# Altium PCB MODBUS_Interface_Board__03.PcbDoc
Units mm, origin at the board's own origin, x right, y up, seen from the top; angles counter-clockwise.
Board outline 56 x 26 mm, 2 copper layers (Top Layer, Bottom Layer); 20 components, 17 nets, 88 pads, 0 vias.
Unrouted connection lines stored in the file: 3.
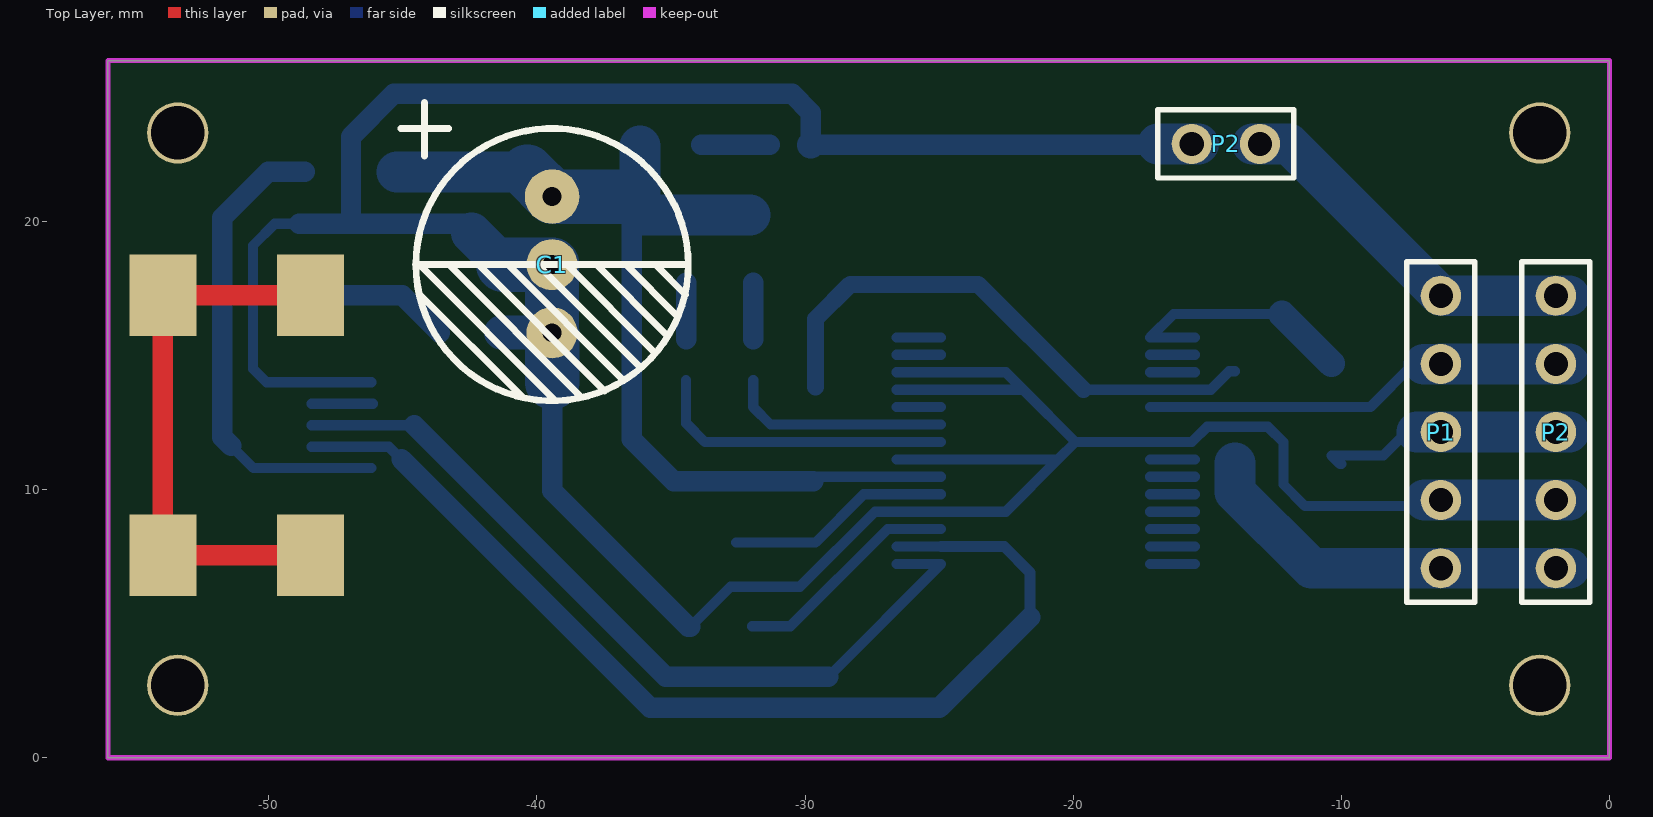
[diagram p0: Top Layer view]
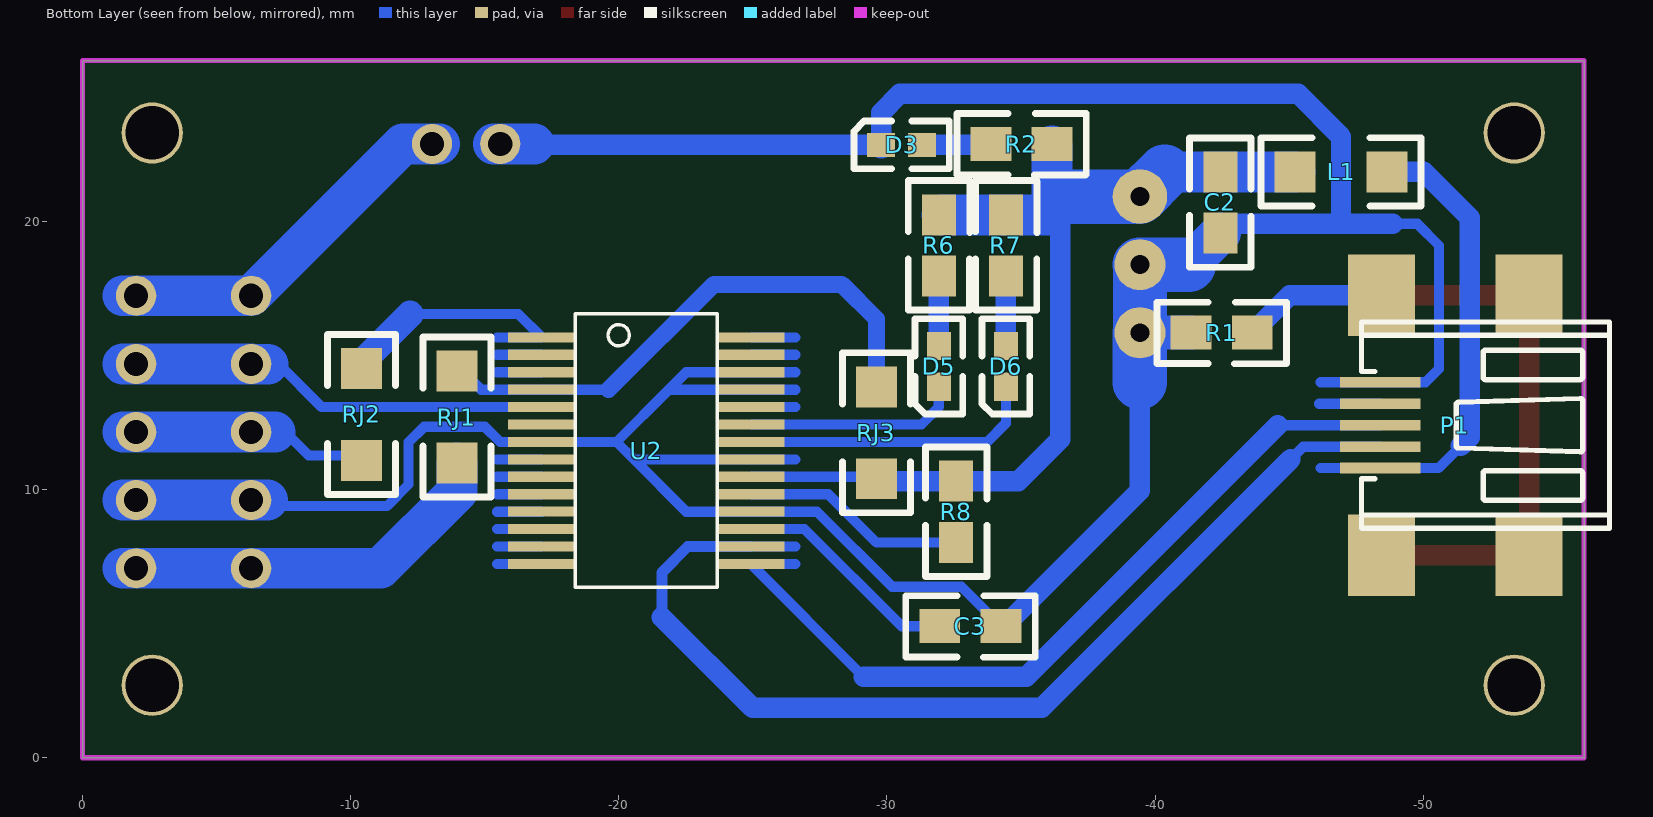
[diagram p1: Bottom Layer view, seen from below]
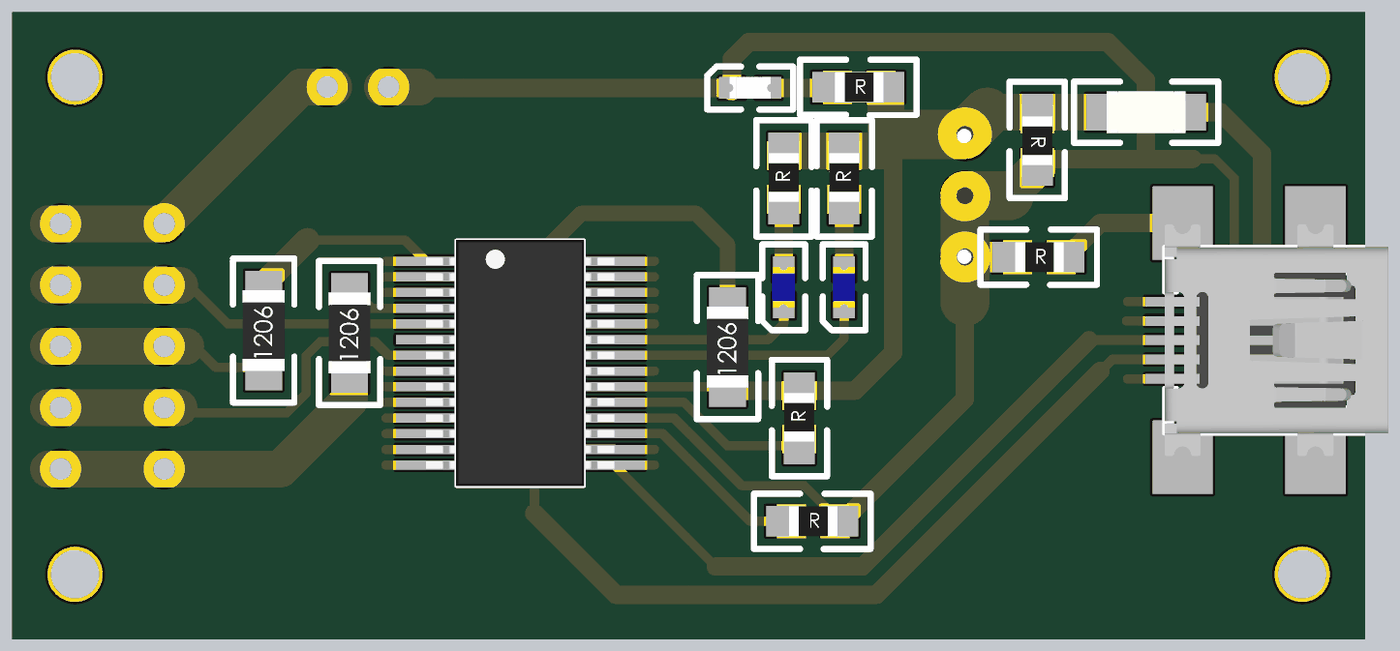
[diagram p2: 3D render of the assembled board from below, using the file's embedded part models]

## Layer stack, top to bottom
Top Solder: solder mask 0.0102, Solder Resist, Dk 3.5
Top Layer: signal copper 0.0356
Dielectric 1: dielectric 0.32, FR-4, Dk 4.8
Bottom Layer: signal copper 0.0356
Bottom Solder: solder mask 0.0102, Solder Resist, Dk 3.5

## Board outline
-56,0 -56,26 0,26 0,0

## Design rules (kind name [scope] priority, off if disabled: settings)
Clearance [All] p1: gap=0.254 ignorepadtopadclearanceinfootprint=FALSE
PolygonConnect [All] p1: connectstyle=Relief reliefconductorwidth=0.254 reliefentries=4 polygonreliefangle="90 Angle" airgapwidth=0.254
RoutingVias [All] p1: holewidth=0.711 width=1.27 viastyle="Through Hole" minholewidth=0.711 minwidth=1.27 maxholewidth=0.711 maxwidth=1.27
SolderMaskExpansion [All] p1: expansion=0.102
Width [All] p1: maxlimit=25.4 minlimit=0.254 preferedwidth=0.254
30 further rules are at their usual default settings.

## Components (designator, comment, footprint, x,y, rotation, side; value= is the part's Value field where it differs from the comment)
C1 "10uF/16V" RB.2/.4_P -39.438,15.848 r0 top value=100pF
C2 "100nF" 0805_SMD -42.438,20.705 r270 bottom
C3 "100nF" 0805_SMD -33.115,4.902 r180 bottom
D3 "LED WHITE" "0603 SMD LED" -30.548,22.851 r0 bottom
D5 "LED RED" "0603 SMD LED" -31.938,14.594 r270 bottom
D6 "LED BLUE" "0603 SMD LED" -34.438,14.594 r270 bottom
L1 "Ferrite Bead" 1206_SMD -46.938,21.848 r0 bottom
P1 "RF_MODULE" HDR1X5 -6.289,17.225 r270 top
P1 "miniUSB Female SMD" "MINIUSB SMD" -48.4,12.4 r270 bottom
P2 "RF_MODULE" HDR1X5 -2,17.225 r270 top
P2 "SET" HDR1X2 -13.039,22.891 r180 top
R1 "100" 0805_SMD -42.486,15.848 r180 bottom
R2 "330" 0805_SMD -35.02,22.885 r180 bottom
R6 "330" 0805_SMD -31.938,19.102 r90 bottom
R7 "330" 0805_SMD -34.438,19.102 r90 bottom
R8 "1k" 0805_SMD -32.581,9.169 r90 bottom
RJ1 "0" 1206_SMD -13.963,12.7 r90 bottom
RJ2 "0" 1206_SMD -10.407,12.802 r90 bottom
RJ3 "0" 1206_SMD -29.609,12.116 r90 bottom
U2 "FT232RL" SSOP-28 -17.127,15.675 r270 bottom

## Footprints (in the part's own frame and the unit in brackets; to place one, negate y for a bottom-side part, rotate by r counter-clockwise, add the part's x,y. Pads: shape width x height; smd on the part's side, far side on the other; paste and mask are expansions set on the pad)
"0603 SMD LED" [mm]
  rect 1.05x0.9 smd: A(-0.762,0) K(0.762,0)
  silkscreen extent -1.78,-0.89 1.78,0.89, body extent -0.85,-0.45 0.85,0.45, height 0.9
0805_SMD [mil]
  rect 60x50 smd: 1(-45,0) 2(45,0)
  silkscreen extent -95,-45 95,45, body extent -57,-28 61,27, height 21
1206_SMD [mil]
  rect 60x60 smd: 1(-67.5,0) 2(67.5,0)
  silkscreen extent -117,-50 118,50, body extent -66,-34 66,34, height 33
HDR1X2 [mm] "Connector; Header; 2 Position"
  round 1.5 hole 0.9: 1(0,0) 2(2.54,0)
  silkscreen extent -1.27,-1.27 3.81,1.27
HDR1X5 [mm] "Connector; Header; 5 Position"
  round 1.5 hole 0.9: 1(0,0) 2(2.54,0) 3(5.08,0) 4(7.62,0) 5(10.16,0)
  silkscreen extent -1.27,-1.27 11.43,1.27
"MINIUSB SMD" [mm]
  rect 3.048x2.5 smd: 0(-4.85,0.05) 0(-4.85,5.55) 0(4.85,5.55) 0(4.85,0.05)
  rect 0.4x3 smd: 1(1.6,0) 2(0.8,0) 3(0,0) 4(-0.8,0) 5(-1.6,0)
  silkscreen extent -3.85,-0.7 3.85,8.55, body extent -4.8,-0.7 4.8,8.55, height 4
RB.2/.4_P [mm]
  round 2.032 hole 0.7: 1(0,5.08)
  round 1.905 hole 0.7: 2(0,0) 2(0,2.54)
  silkscreen extent -5.65,-2.54 5.08,8.59, body extent -5.21,-2.69 5.26,7.76, height 17.5
SSOP-28 [mm]
  rect 0.38x2.5 smd: 1(0,0) 2(0.65,0) 3(1.3,0) 4(1.95,0) 5(2.6,0) 6(3.25,0) 7(3.9,0) 8(4.55,0) 9(5.2,0) 10(5.85,0) 11(6.5,0) 12(7.15,0) 13(7.8,0) 14(8.45,0) 15(8.45,7.8) 16(7.8,7.8) 17(7.15,7.8) 18(6.5,7.8) 19(5.85,7.8) 20(5.2,7.8) 21(4.55,7.8) 22(3.9,7.8) 23(3.25,7.8) 24(2.6,7.8) 25(1.95,7.8) 26(1.3,7.8) 27(0.65,7.8) 28(0,7.8)
  silkscreen extent -0.87,1.25 9.33,6.55, body extent -0.87,0 9.33,7.8, height 1.9

## Part data
C1: library part "Cap Pol1", "Polarized Capacitor (Radial)", LatestRevisionDate=17-Jul-2002, LatestRevisionNote="Re-released for DXP Platform.", PackageReference=RB7.6-15, Published=8-Jun-2000, Publisher="Altium Limited"
C2 C3: library part Cap, "Capacitor", LatestRevisionDate=17-Jul-2002, LatestRevisionNote="Re-released for DXP Platform.", PackageDescription="Radial Cap, Thru-Hole; 2 Leads; 0.3 in Pin Spacing", PackageReference=RAD-0.3, Published=8-Jun-2000, Publisher="Altium Limited"
D3 D5 D6: library part LED
L1: library part Inductor
P1 P2: library part "Header 5", "Header, 5-Pin", LatestRevisionDate=17-Jul-2002, LatestRevisionNote="Re-released for DXP Platform.", Publisher="Altium Limited"
P1: library part miniUSB
P2: library part "Header 2", "Header, 2-Pin", LatestRevisionDate=17-Jul-2002, LatestRevisionNote="Re-released for DXP Platform.", Publisher="Altium Limited"
R1 R2 R6 R7 R8 RJ1 RJ2 RJ3: library part Res1, "Resistor", LatestRevisionDate=17-Jul-2002, LatestRevisionNote="Re-released for DXP Platform.", PackageReference=AXIAL-0.3, Published=8-Jun-2000, Publisher="Altium Limited"

## Free pads (board coordinates)
  rect 2.5x3.048 all layers, no hole: 13(-53.95,7.55) 13(-53.95,17.25) 13(-48.45,7.55) 13(-48.45,17.25)
  round 2.286 hole 2: 14(-2.6,23.3) 15(-2.6,2.7) 16(-53.4,2.7) 17(-53.4,23.3)

## Nets (pads, with @x,y where several pads share a name; then routed paths per layer and width w, separated by ;. In a path a pad name is that pad's centre, name@x,y a point inside that pad or via, vN(x,y) a via of type N, cw(c..) or ccw(c..) an arc to the next point about the centre after c; other vN are vias at no path point)
FT232_3.3V_OUT: C3.1 U2.17 | length 8.5
  Bottom Layer w0.381: C3.1 -30.549,4.902 -26.927,8.525 U2.17
FT232_RESET: R8.1 U2.19 | length 8.4
  Bottom Layer w0.381: R8.1 -29.609,8.026 -27.811,9.825 U2.19
GND: C1.2 C2.2 C3.2 D3.K P1.4@-6.289,9.605 P1.5@-48.4,14 P2.2@-15.579,22.891 P2.4 R1.1 U2.7 U2.18 U2.21 U2.25 U2.26 | length 134.3
  Bottom Layer w0.381: -48.863,19.914 -49.777,19.914 -50.59,19.101 -50.59,14.503 -50.086,14 -48.4,14 -46.175,14 ; C3.2@-34.283,4.877 C3.2 -32.784,6.375 -30.194,6.375 -27.394,9.175 U2.18 -22.517,9.175 -20.567,11.125 ; -26.584,11.125 U2.21 -20.567,11.125 ; -26.584,13.725 U2.25 -21.867,13.725 ; -26.584,14.375 U2.26 -22.517,14.375 -21.867,13.725 ; P1.4@-6.899,9.605 -6.678,9.384 -11.359,9.384 -12.16,10.185 -12.16,11.76 -12.744,12.344 -15.004,12.344 -15.574,11.775 U2.7 -19.917,11.775 ; -21.867,13.725 -19.917,11.775 ; -20.567,11.125 -19.917,11.775
  Bottom Layer w0.762: -48.863,19.914 -46.938,19.914 ; C2.2 -42.79,19.914 -46.938,19.914 ; -39.438,14 -39.438,9.96 -34.355,4.877 C3.2@-34.283,4.877 ; P2.2@-15.619,22.851 D3.K -29.786,24.057 -30.485,24.756 -45.344,24.756 -46.938,23.162 -46.938,19.914
  Bottom Layer w1.016: D3.K D3.K@-29.746,22.891
  Bottom Layer w1.27: R1.1 C1.2@-39.438,15.848
  Bottom Layer w1.524: C2.2 -41.264,18.388 ; -16.849,22.891 -15.579,22.891 P2.2@-15.325,22.891 ; P1.4@-6.899,9.605 -6.289,9.605 P2.4 P2.4@-1.5,9.605
  Bottom Layer w2: C1.2@-39.438,15.848 C1.2@-39.438,18.388
  Bottom Layer w2.032: -41.264,18.388 C1.2@-39.438,18.388 ; -39.438,14 C1.2@-39.438,15.848
NetD3_A: D3.A R2.1 | length 2.6
  Bottom Layer w0.762: R2.1@-33.877,22.851 D3.A
NetD5_A: D5.A R6.1 | length 2.1
  Bottom Layer w0.762: D5.A@-31.938,15.61 R6.1@-31.938,17.705
NetD6_A: D6.A R7.1 | length 2.1
  Bottom Layer w0.762: D6.A@-34.438,15.61 R7.1@-34.438,17.705
RF_SET: P1.1@-6.289,17.225 P2.1 | length 14.2
  Bottom Layer w1.524: P2.1@-13.308,22.891 -13.039,22.891 -11.955,22.891 -6.289,17.225 P2.1@-1.5,17.225
RXD: P1.2@-6.289,14.685 P2.2@-2,14.685 U2.5 | length 18.3
  Bottom Layer w0.381: U2.5 -8.918,13.075 -7.308,14.685 -6.301,14.685 P1.2@-6.289,14.685
  Bottom Layer w1.524: P1.2@-6.301,14.685 -6.924,14.673 -5.527,14.673 ; P1.2@-6.289,14.685 -2,14.685 P2.2@-1.5,14.685
RXLED: D6.K U2.22 | length 11.4
  Bottom Layer w0.381: D6.K@-34.438,14.086 D6.K -34.438,12.474 -33.739,11.775 U2.22
TXD: P1.3@-6.289,12.145 P2.3 RJ2.1 RJ2.2 U2.1 | length 20.9
  Bottom Layer w0.381: -12.213,16.541 -16.26,16.541 U2.1 ; RJ2.1@-9.991,10.953 -10.054,10.953 -10.372,11.271 -8.433,11.271 -7.559,12.145 -7.178,12.145 ; U2.1 -15.469,15.675 U2.1
  Bottom Layer w1.016: -12.213,16.541 RJ2.2@-10.372,14.7
  Bottom Layer w1.524: -7.178,12.145 -6.289,12.145 P2.3@-1.5,12.145
TXDEN: U2.13 | length 1.7
  Bottom Layer w0.381: U2.13 -15.469,7.875
TXLED: D5.K U2.23 | length 8.3
  Bottom Layer w0.381: D5.K@-31.938,14.086 D5.K -31.938,13.073 -31.29,12.425 U2.23
USB_D+: P1.3@-48.4,12.4 U2.15 | length 30.8
  Bottom Layer w0.381: -29.129,3.023 U2.15 -26.584,7.225
  Bottom Layer w0.4: P1.3@-48.4,12.4 -44.575,12.4
  Bottom Layer w0.762: -44.575,12.4 -35.197,3.023 -29.129,3.023
USB_D-: P1.2@-48.4,11.6 U2.16 | length 39.3
  Bottom Layer w0.381: -26.584,7.875 U2.16
  Bottom Layer w0.4: P1.2@-48.4,11.6 -45.527,11.6 -45.053,11.125 ; U2.16 -22.574,7.875 -21.608,6.909 -21.608,5.232
  Bottom Layer w0.762: -45.053,11.125 -35.782,1.854 -24.987,1.854 -21.608,5.232
USB_SHIELD: P1.0 pad.13 R1.2 | length 26.1
  Top Layer w0.762: pad.13@-48.45,7.55 -53.95,7.55 -53.95,17.25 pad.13@-48.45,17.25
  Bottom Layer w0.762: pad.13@-48.45,17.25 -45.031,17.25 R1.2
USB_VCC: L1.1 P1.1@-48.4,10.8 | length 18
  Bottom Layer w0.381: -51.4,11.625 -50.575,10.8 -48.4,10.8 -46.17,10.8
  Bottom Layer w0.762: -51.4,11.625 -51.733,11.957 -51.733,20.142 -50.027,21.848 L1.1
VCC: C1.1 C2.1 L1.2 P1.5@-6.289,7.065 P2.5 R2.2 R6.2 R7.2 R8.2 RJ1.1 RJ1.2 RJ3.1 RJ3.2 U2.4 U2.20 | length 72.1
  Bottom Layer w0.381: RJ3.1@-29.698,10.312 RJ3.1 -29.536,10.475 U2.20 ; -19.621,13.725 U2.4 -14.869,13.725 -14.179,14.415 RJ1.2
  Bottom Layer w0.635: RJ3.2 -29.609,16.358 -28.314,17.653 -23.549,17.653 -19.621,13.725
  Bottom Layer w0.762: -36.467,20.244 -36.467,11.875 -34.905,10.312 R8.2 RJ3.1@-29.698,10.312 ; R6.2@-32.059,20.244 R6.2@-31.872,20.057
  Bottom Layer w1.524: L1.2 C2.1 -40.358,21.848 ; R2.2@-36.163,22.809 -36.163,20.244 R6.2@-32.059,20.244 ; RJ1.1 -13.963,9.913 -11.115,7.065 -6.289,7.065 P2.5 P2.5@-1.5,7.065
  Bottom Layer w2.032: -40.358,21.848 C1.1 -36.442,20.928
pads on no net: P1.4@-48.4,13.2 U2.2 U2.3 U2.6 U2.8 U2.9 U2.10 U2.11 U2.12 U2.14 U2.24 U2.27 U2.28
copper on no net: | length 20.5
  Bottom Layer w0.381: -48.4,13.2 -46.127,13.2 ; -26.584,13.075 -24.927,13.075 ; -26.584,15.025 -24.927,15.025 ; -26.584,15.675 -24.927,15.675 ; -17.127,7.225 -15.469,7.225 ; -17.127,8.525 -15.469,8.525 ; -17.127,9.175 -15.469,9.175 ; -17.127,9.825 -15.469,9.825 ; -17.127,10.475 -15.469,10.475 ; -17.127,11.125 -15.469,11.125 ; -17.127,14.375 -15.469,14.375 ; -17.127,15.025 -15.469,15.025

## Keep-outs
Keep-Out Layer:
  lines w0.2: -56,26 0,26 ; -56,26 -56,0 0,0 ; -56,26 0,26 ; 0,0 0,26 ; 0,0 0,26